# EAGLE board MotorBoardDev (EAGLE 8.4.1)
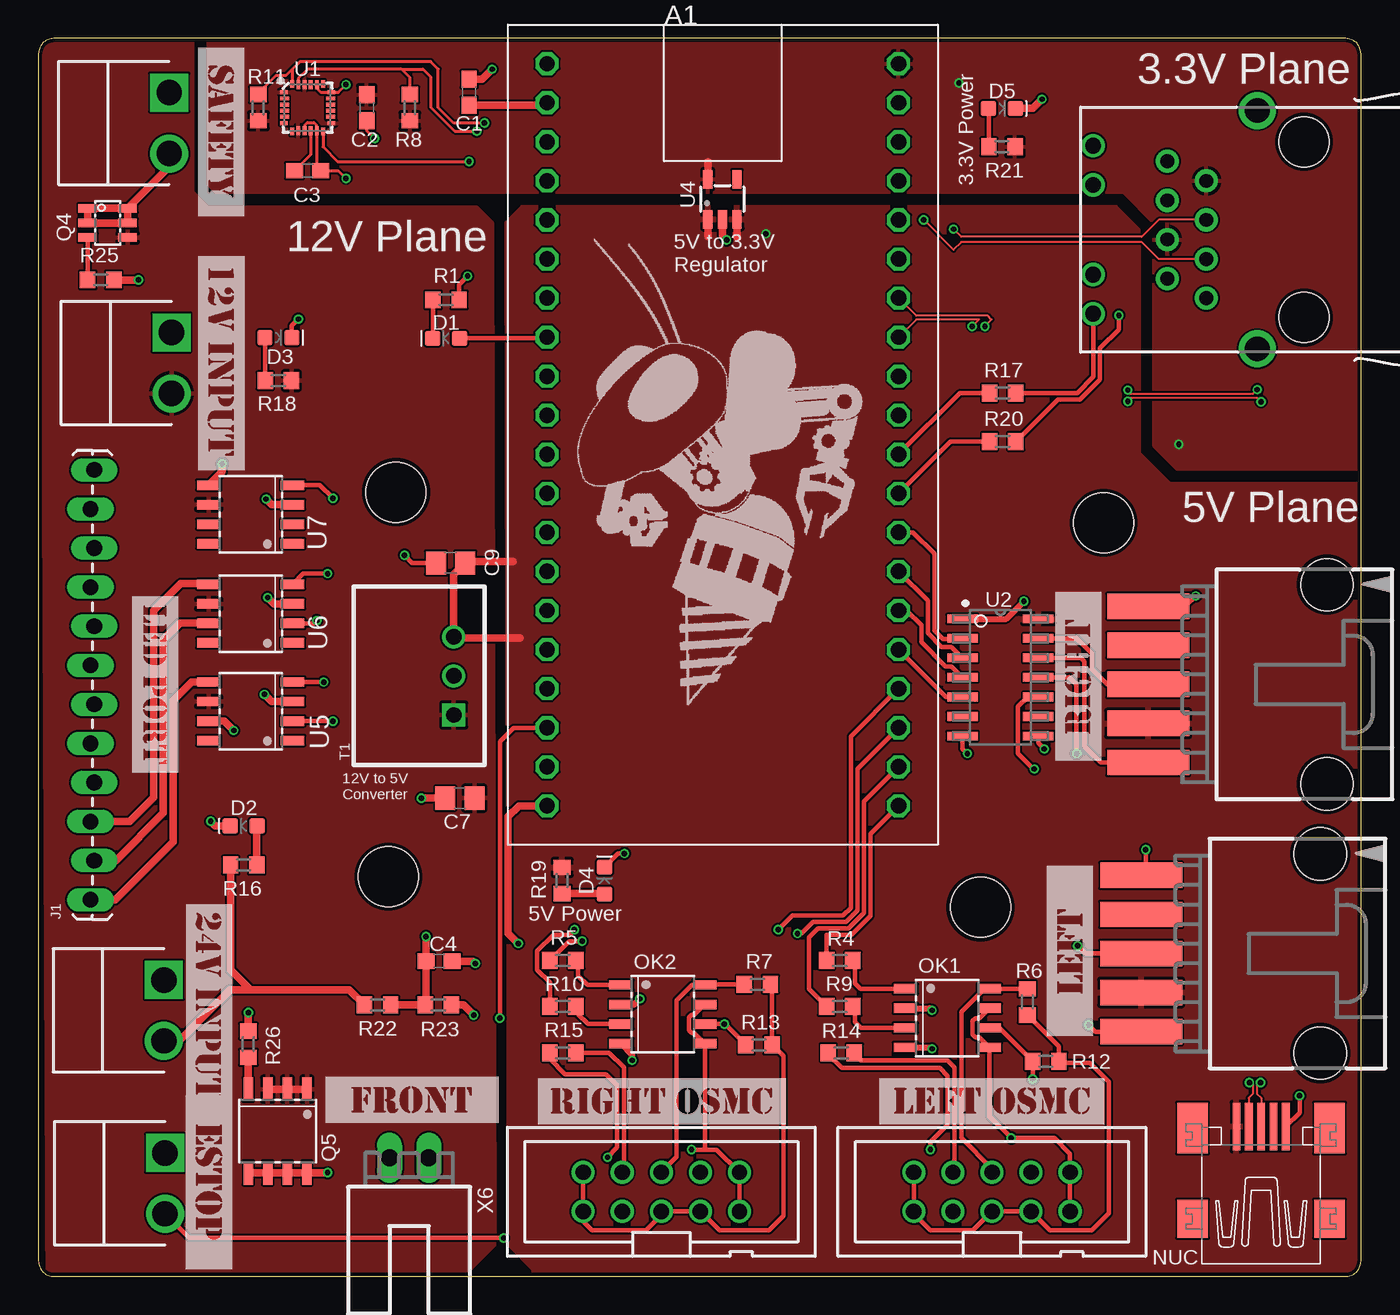
[diagram p0: board, top side]
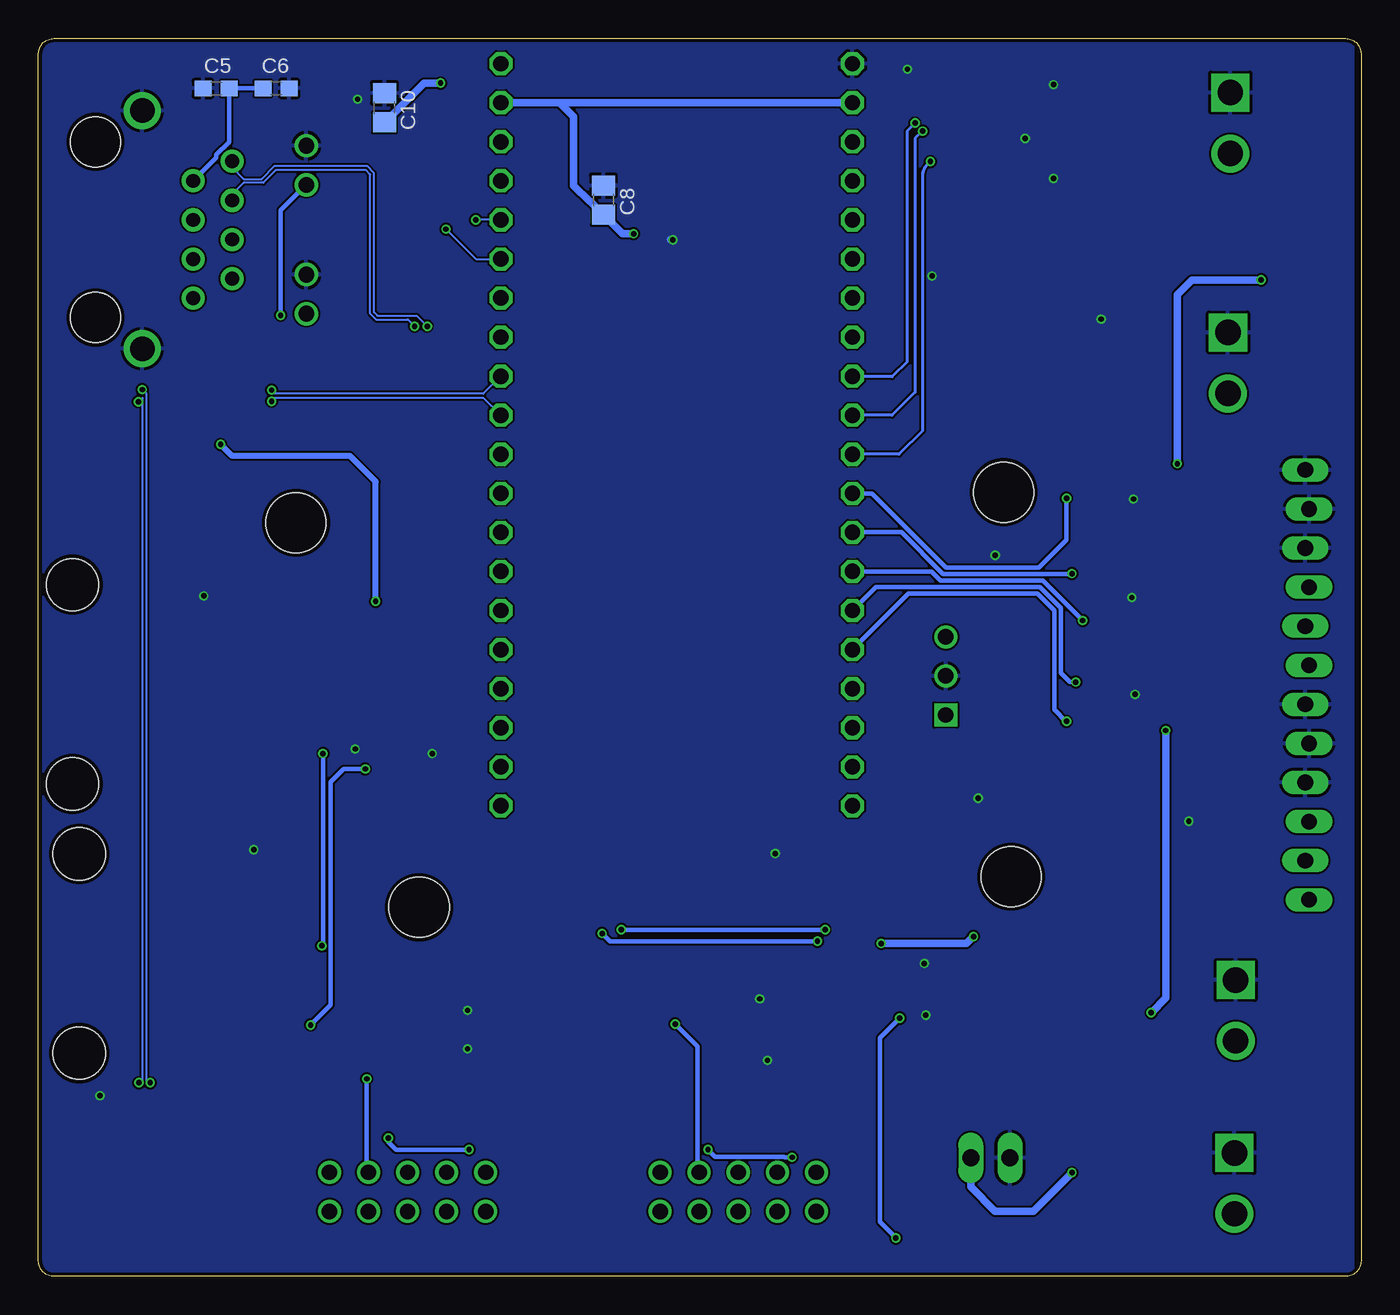
[diagram p1: board, bottom side, seen from below]

Size 86 x 80.5 mm. Coordinates in mm from the lower left corner, seen from the top.
Outline: 0,79.5 0,1 arc90 1,0 85,0 arc90 86,1 86,79.5 arc90 85,80.5 1,80.5 arc90 0,79.5
Copper layers (1*16): Top 0.018mm / dielectric 1.55mm / Bottom 0.018mm
Design rules "eC_2Layer_PClass7_BaseCopperO18": minimum track width 0.125mm, minimum drill 0.35mm, track to track 0.125mm, track to pad 0.125mm, pad to pad 0.125mm, via to via 0.125mm, smd to smd 0mil, copper to edge 0.25mm, drill to drill 0.35mm, minimum pad ring 0.175mm, minimum via ring 0.125mm, stop-mask expansion 0mil, vias tented up to drill 0.45mm, thermal gap 0.2mm

## Footprints (pad centres in the part's own frame; a part is rotated, then mirrored left to right if it is on the bottom)
SPARKFUN-BOARDS_DIL40_0.9 = drill 1 pad 1.397 octagon: 1 -22.86,-11.43; 2 -20.32,-11.43; 3 -17.78,-11.43; 4 -15.24,-11.43; 5 -12.7,-11.43; 6 -10.16,-11.43; 7 -7.62,-11.43; 8 -5.08,-11.43; 9 -2.54,-11.43; 10 0,-11.43; 11 2.54,-11.43; 12 5.08,-11.43; 13 7.62,-11.43; 14 10.16,-11.43; 15 12.7,-11.43; 16 15.24,-11.43; 17 17.78,-11.43; 18 20.32,-11.43; 19 22.86,-11.43; 20 25.4,-11.43; 21 25.4,11.43; 22 22.86,11.43; 23 20.32,11.43; 24 17.78,11.43; 25 15.24,11.43; 26 12.7,11.43; 27 10.16,11.43; 28 7.62,11.43; 29 5.08,11.43; 30 2.54,11.43; 31 0,11.43; 32 -2.54,11.43; 33 -5.08,11.43; 34 -7.62,11.43; 35 -10.16,11.43; 36 -12.7,11.43; 37 -15.24,11.43; 38 -17.78,11.43; 39 -20.32,11.43; 40 -22.86,11.43
C0603 = smd 1.1 x 1: 1 -0.85,0; 2 0.85,0
C0805 = smd 1.3 x 1.5: 1 -0.95,0; 2 0.95,0
LED-0603 = smd 1 x 1: A -0.877,0; C 0.877,0
1X12_LOCK_LONGPADS = drill 1.016 long: 1 0,0.127; 2 2.54,-0.127; 3 5.08,0.127; 4 7.62,-0.127; 5 10.16,0.127; 6 12.7,-0.127; 7 15.24,0.127; 8 17.78,-0.127; 9 20.32,0.127; 10 22.86,-0.127; 11 25.4,0.127; 12 27.94,-0.127
B2PS-CENTERED = drill 1.65 square: 1 -1.98,0 | drill 1.65: 2 1.98,0
SOIC08-FAIRCHILD = smd 0.61 x 1.52: 1 -1.905,-2.723; 2 -0.635,-2.723; 3 0.635,-2.723; 4 1.905,-2.723; 5 1.905,2.723; 6 0.635,2.723; 7 -0.635,2.723; 8 -1.905,2.723
SOT23-6 = smd 0.55 x 1.2: 1 -0.95,-1.3; 2 0,-1.3; 3 0.95,-1.3; 4 0.95,1.3; 5 0,1.3; 6 -0.95,1.3
SOIC-8 = smd 0.61 x 1.52: 1 -1.905,-2.723; 2 -0.635,-2.723; 3 0.635,-2.723; 4 1.905,-2.723; 5 1.905,2.723; 6 0.635,2.723; 7 -0.635,2.723; 8 -1.905,2.723
R0603 = smd 1 x 1.1: 1 -0.85,0; 2 0.85,0
R-78E = drill 1 square: 1 -2.54,0 | drill 1: 2 0,0; 3 2.54,0
QFN24-3X3 = smd 0.495 x 0.25: 1 -1.552,1; 6 -1.552,-1; 13 1.552,-1; 18 1.552,1 | smd 0.6 x 0.25: 2 -1.5,0.6; 3 -1.5,0.2; 4 -1.5,-0.2; 5 -1.5,-0.6; 14 1.5,-0.6; 15 1.5,-0.2; 16 1.5,0.2; 17 1.5,0.6 | smd 0.25 x 0.495: 7 -1,-1.552; 12 1,-1.552; 19 1,1.552; 24 -1,1.552 | smd 0.25 x 0.6: 8 -0.6,-1.5; 9 -0.2,-1.5; 10 0.2,-1.5; 11 0.6,-1.5; 20 0.6,1.5; 21 0.2,1.5; 22 -0.2,1.5; 23 -0.6,1.5
D14 = smd 1.981 x 0.559: 1 -2.464,3.81; 2 -2.464,2.54; 3 -2.464,1.27; 4 -2.464,0; 5 -2.464,-1.27; 6 -2.464,-2.54; 7 -2.464,-3.81; 8 2.464,-3.81; 9 2.464,-2.54; 10 2.464,-1.27; 11 2.464,0; 12 2.464,1.27; 13 2.464,2.54; 14 2.464,3.81
SOT-23-5 = smd 0.6 x 1.2: 1 -0.95,-1.306; 2 0,-1.306; 3 0.95,-1.306; 4 0.95,1.306; 5 -0.95,1.306
STANDOFF-HOLE = hole 3.9: 0,0
32005-400 = smd 3.1 x 0.5: 1 3,1.6; 2 3,0.8; 3 3,0; 4 3,-0.8; 5 3,-1.6 | smd 2.5 x 2: M1 -3,-4.45; M2 -3,4.45 | smd 3.3 x 2: M3 2.9,4.45; M4 2.9,-4.45
15-91-05 = smd 1.651 x 5.334: 1 -5.08,-10.795; 2 -2.54,-10.795; 3 0,-10.795; 4 2.54,-10.795; 5 5.08,-10.795 | hole 3.404: -6.477,0.838; 6.477,0.838
PAK100/2500-10 = drill 1 pad 1.422: 1 -5.08,-1.27; 2 -5.08,1.27; 3 -2.54,-1.27; 4 -2.54,1.27; 5 0,-1.27; 6 0,1.27; 7 2.54,-1.27; 8 2.54,1.27; 9 5.08,-1.27; 10 5.08,1.27
70553-02 = drill 1.092 long: 1 -1.27,-7.62; 2 1.27,-7.62
SI-50170 = drill 0.9 pad 1.5: 1 4.445,5.842; 2 3.175,3.302; 3 1.905,5.842; 4 0.635,3.302; 5 -0.635,5.842; 6 -1.905,3.302; 7 -3.175,5.842; 8 -4.445,3.302 | drill 1.016 pad 1.5: A1 -5.461,10.668; A2 2.921,10.668; C1 -2.921,10.668; C2 5.461,10.668 | drill 1.6 pad 2.2: S1 -7.747,0; S2 7.747,0 | hole 3.251: -5.715,-3.048; 5.715,-3.048

## Placement (x,y rotation side)
A1  MBED1768  [SPARKFUN-BOARDS_DIL40_0.9]  44.5,56 270 top
C1  0.1uF  [C0603]  28,77 90 top
C2  0.1uF  [C0603]  21.35,76 270 top
C3  0.1uF  [C0603]  17.5,71.9 0 top
C4  0.1uF  [C0603]  26.05,20.5 0 top
C5  0.1uF  [C0603]  74.45,77.25 180 bottom
C6  0.1uF  [C0603]  70.55,77.25 0 bottom
C7  10uF  [C0805]  27.4,31.1 180 top
C8  10uF  [C0805]  49.26,69.98 90 bottom
C9  10uF  [C0805]  26.8,46.4 180 top
C10  1uF  [C0805]  63.5,76 90 bottom
D1  BLUE  [LED-0603]  26.5,61 180 top
D2  Yellow  [LED-0603]  13.35,29.3 180 top
D3  BLUE  [LED-0603]  15.6,61.05 0 top
D4  GREEN  [LED-0603]  36.8,25.73 90 top
D5  GREEN  [LED-0603]  62.65,75.95 0 top
J1  Under Glow  [1X12_LOCK_LONGPADS]  3.5,24.5 90 top
J2  B2PS-VH(LF)(SN)  [B2PS-CENTERED]  8.5,75 270 top
J3  B2PS-VH(LF)(SN)  [B2PS-CENTERED]  8.65,59.4 270 top
J4  B2PS-VH(LF)(SN)  [B2PS-CENTERED]  8.15,17.3 270 top
J5  B2PS-VH(LF)(SN)  [B2PS-CENTERED]  8.23,6.05 270 top
OK1  MOCD208M  [SOIC08-FAIRCHILD]  59.1,16.8 270 top
OK2  MOCD208M  [SOIC08-FAIRCHILD]  40.6,17.05 270 top
Q4  STT4P3LLH6  [SOT23-6]  4.5,68.5 270 top
Q5  RRH100P03GZETB  [SOIC-8]  15.55,9.45 180 top
R1  100  [R0603]  26.5,63.5 180 top
R4  30  [R0603]  52.1,20.55 0 top
R5  30  [R0603]  34.1,20.55 0 top
R6  4.7k  [R0603]  64.3,17.85 270 top
R7  4.7k  [R0603]  46.75,19 0 top
R8  4.7k  [R0603]  24.15,76 270 top
R9  30  [R0603]  52.1,17.55 0 top
R10  30  [R0603]  34.1,17.55 0 top
R11  4.7k  [R0603]  14.3,76 270 top
R12  4.7k  [R0603]  65.5,14 0 top
R13  4.7k  [R0603]  46.85,15.05 0 top
R14  1k  [R0603]  52.2,14.55 0 top
R15  1k  [R0603]  34.1,14.55 0 top
R16  1.8k  [R0603]  13.35,26.75 180 top
R17  500  [R0603]  62.7,57.45 0 top
R18  1k  [R0603]  15.6,58.25 0 top
R19  200  [R0603]  34.05,25.75 90 top
R20  500  [R0603]  62.7,54.3 0 top
R21  100  [R0603]  62.65,73.45 0 top
R22  4.7k  [R0603]  22.05,17.65 180 top
R23  510  [R0603]  26,17.65 180 top
R25  2.7k  [R0603]  4.05,64.8 180 top
R26  2.7k  [R0603]  13.65,15.1 270 top
T1  R-78E5.0-1.0  [R-78E]  27,39.05 90 top
U1  9DoF IMU  [QFN24-3X3]  17.5,76 0 top
U2  TXB0104DR  [D14]  62.55,38.95 0 top
U4  TLV70233DBVR  [SOT-23-5]  44.47,70.04 0 top
U5  TC4427ACOA713  [SOIC-8]  13.8,36.75 90 top
U6  TC4427ACOA713  [SOIC-8]  13.8,43.1 90 top
U7  TC4427ACOA713  [SOIC-8]  13.8,49.55 90 top
U$1  [STANDOFF-HOLE]  23.25,51 0 top
U$2  [STANDOFF-HOLE]  22.75,26 0 top
U$3  [STANDOFF-HOLE]  61.25,24 0 top
U$4  [STANDOFF-HOLE]  69.25,49 0 top
U$5  [12VINPUT]  10.4,66.35 270 top
U$6  [24VINPUT]  9.6,24.2 270 top
U$7  [LEFTOSMC]  54.7,9.9 0 top
U$8  [RIGHTOSMC]  32.5,9.9 0 top
U$9  [LEDPORT]  6.1,44.2 270 top
U$10  [ROBOBUZZ_1.4X]  42.15,37.15 0 top
U$11  [ESTOP]  9.6,11.75 270 top
U$12  [SAFETY]  10.4,79.9 270 top
U$13  [LEFT]  68.55,15.65 90 top
U$14  [RIGHT]  69.1,33.55 90 top
U$15  [FRONT]  18.7,10 0 top
X1  MINI-USB_SHIELD5P4-32005-400  [32005-400]  79.5,6.75 90 top
X2  C-GRID-05-15-91  [15-91-05]  82.95,38.5 270 top
X3  2510-  [PAK100/2500-10]  62,5.5 0 top
X4  2510-  [PAK100/2500-10]  40.5,5.5 0 top
X5  C-GRID-05-15-91  [15-91-05]  82.5,21 270 top
X6  C-GRID-02-70553  [70553-02]  24.1,0.1 180 top
X7  SI-50170  [SI-50170]  79.25,68.06 90 top

## Library data of the parts
A1 = MotorBoardDev; PROD_ID: COMP-12167
C1-C10 R1 R4-R23 R25 R26 = rcl
D1 D3 = SparkFun-LED; PROD_ID: DIO-08575
D2 = SparkFun-LED; PROD_ID: DIO-09003
D4 D5 = SparkFun-LED; PROD_ID: DIO-00821
J1 = SparkFun-Connectors
J2-J5 = RoboJackets-Connectors; DIGIKEY: 455-1648-ND; MPN: B2PS-VH(LF)(SN)
OK1 OK2 = optocoupler; MF: FAIRCHILD SEMICONDUCTOR; MPN: MOCD208M; OC_FARNELL: 1505465; OC_NEWARK: 34C7498
Q4 Q5 T1 U5-U7 U$1-U$9 U$11-U$15 = MotorBoardDev
U1 = SparkFun-Sensors; PROD_ID: IC-13192
U2 = MotorBoardDev; MANUFACTURER_PART_NUMBER: TXB0104DR; VENDOR: Texas Instruments
U4 = RoboJackets-PowerICs; DIGIKEY: 296-32415-1-ND; MPN: TLV70233DBVR
U$10 = RoboJackets-Aesthetics
X1 = con-cypressindustries; OC_FARNELL: unknown; OC_NEWARK: unknown
X2 X5 X6 = con-molex; OC_FARNELL: unknown; OC_NEWARK: unknown
X3 X4 = con-3m; MF: 3M; MPN: 2510-6002UB; OC_FARNELL: 9838244; OC_NEWARK: 46F4725
X7 = con-stewart; OC_FARNELL: unknown; OC_NEWARK: unknown

## Nets
3V3_LED_R: D5.A R21.1
5V_LED_R: D4.A R19.1
12V_LED_R: D3.A R18.1
24V_LED_R: D2.A R16.1
+3V3: A1.40 C2.1 C5.1 C6.1 C10.1 R8.2 R11.2 R21.2 U1.1 U1.8 U1.13 U1.22 U2.1 U4.5 X7.2 X7.5
+5V: A1.2 A1.39 C1.1 C8.1 C9.1 R19.2 T1.3 U2.14 U4.1 U4.3 X1.1 X2.4 X5.4
+12V: C7.1 J3.2 Q4.4 Q5.1 Q5.2 Q5.3 R18.2 T1.1 U5.6 U6.6 U7.6
+24V: J4.2 R16.2 R22.2
BATTIN: A1.20 C4.1 R22.1 R23.2
BLUE_3V3: A1.15 U5.4
BLUE_OUT: J1.1 U5.5
D_N: A1.32 X1.2
D_P: A1.31 X1.3
ESTOP: A1.18 J5.2
ETH_LED1: A1.30 R17.1
ETH_LED2: A1.29 R20.1
FRONT_HDR: Q5.5 Q5.6 Q5.7 Q5.8 X6.1
FRONT_LIGHT: R26.1 U5.7
FRONT_LIGHT_3V3: A1.16 U5.2
FRONT_R: Q5.4 R26.2
GND: A1.1 C1.2 C2.2 C3.2 C4.2 C5.2 C6.2 C7.2 C8.2 C9.2 C10.2 D2.C D3.C D4.C D5.C J1.4 J1.5 J1.6 J1.10 J1.11 J1.12 J2.1 J3.1 J4.1 J5.1 OK1.2 OK1.4 OK2.2 OK2.4 R1.1 R23.1 T1.2 U1.9 U1.11 U1.18 U1.20 U2.7 U2.8 U4.2 U5.3 U6.3 U7.3 X1.5 X2.1 X5.1 X6.2 X7.C1 X7.C2 X7.S1 X7.S2
GREEN_3V3: A1.14 U6.2
GREEN_OUT: J1.2 U6.7
GYRO_INT: A1.11 U1.12
INDI_LED_R: D1.C R1.2
INDICATOR_LED: A1.8 D1.A
L+12V: R6.2 R12.2 X3.1 X3.2 X3.5 X3.7
LALI: OK1.8 R6.1 X3.6
LALI_CTRL: A1.21 R4.1
LBLI: OK1.6 R12.1 X3.8
LBLI_CTRL: A1.22 R9.1
LDISABLE: R14.2 X3.4
LEA: U2.11 X5.3
LEA3: A1.26 U2.4
LEB: U2.10 X5.5
LEB3: A1.25 U2.5
LGND: OK1.5 OK1.7 R14.1 X3.9 X3.10
N$1: R17.2 X7.A1
N$2: R20.2 X7.A2
R+12V: R7.2 R13.2 X4.1 X4.2 X4.5 X4.7
R_OK3A: OK1.1 R4.2
R_OK3B: OK1.3 R9.2
R_OK4A: OK2.1 R5.2
R_OK4B: OK2.3 R10.2
RALI: OK2.8 R7.1 X4.6
RALI_CTRL: A1.23 R5.1
RBLI: OK2.6 R13.1 X4.8
RBLI_CTRL: A1.24 R10.1
RD_N: A1.36 X7.6
RD_P: A1.35 X7.4
RDISABLE: R15.2 X4.4
REA: U2.13 X2.3
REA3: A1.28 U2.2
REB: U2.12 X2.5
REB3: A1.27 U2.3
RED_3V3: A1.13 U6.4
RED_OUT: J1.3 U6.5
REGOUT_C: C3.1 U1.10
RGND: OK2.5 OK2.7 R15.1 X4.9 X4.10
SAFETY_HRD: J2.2 Q4.1 Q4.2 Q4.5 Q4.6
SAFETY_LIGHT: R25.1 U7.5
SAFETY_LIGHT_3V3: A1.12 U7.4
SAFETY_R: Q4.3 R25.2
SCL: A1.10 R8.1 U1.23
SDA: A1.9 R11.1 U1.24
TD_N: A1.34 X7.3
TD_P: A1.33 X7.1

## Tracks (layer width: path | path; a pad name or v marks a point on that pad's centre or on a via)
3V3_LED_R
  Top 0.3: R21.1 61.8,75.92
  Top 0.5: 61.8,75.92 D5.A
5V_LED_R
  Top 0.5: R19.1 36.75,24.9 D4.A
12V_LED_R
  Top 0.3: R18.1 14.75,61.22 D3.A
24V_LED_R
  Top 0.5: R16.1 14.2,29.27 D2.A
+3V3  (via drill 0.35)
  Top 0.4: U2.1 62.94,42.76 v64.08,43.9
  Top 0.5: U4.5 43.52,72.49
  Bottom 0.3: X7.2 74.43,72.75 74.43,72.94 73.6,73.77 C5.1 C6.1
  Bottom 0.4: v64.08,43.9 64.08,51.67 65.75,53.35 73.4,53.35 v74.15,54.1
  Bottom 0.5: v59.85,77.6 60.92,77.6 63.47,75.05 C10.1
  pour Top: 70.5,70.5 72.5,68.5 72.5,54 74,52.5 85.75,52.5 85.75,79.25 arc90 84.75,80.25 11,80.25 11,71 11.5,70.5
+5V  (via drill 0.35)
  Top 0.5: 43.52,67.61 U4.1 | U4.3 45.42,67.58 45.44,67.56 | 30.85,46.5 27.85,46.5 C9.1 27,45.65 T1.3 27.09,41.5 31.3,41.5 | C1.1 32.9,76.15 A1.2
  Bottom 0.5: v47.3,67.8 48.03,67.8 C8.1 50.13,69.91 50.16,69.91 51.2,70.94 51.2,75.4 52.12,76.32 | 52.12,76.32 A1.39 | 52.12,76.32 A1.2
  pour Top: 32.25,-1.95 32.25,0.35 32.3,0.45 30.65,2.1 30.5,68.5 31.5,69.5 70,69.5 71.5,68 71.5,53.5 73.5,51.5 95,51.5 95,-2
+12V
  Top 0.5: Q5.1 Q5.2 Q5.3
  pour Top: 10,80.5 10,70.5 11,69.5 28.5,69.5 29.5,68.5 29.65,2.1 27.8,0.25 29.5,-1.45 29.5,-2.05 0.6,-2.1 0.25,80.5
+24V
  Top 0.5: R22.2 20.21,18.64 13.8,18.64 | 13.8,18.64 12.46,18.64 9.15,15.32 J4.2 | R16.2 12.5,19.93 13.8,18.64
BATTIN  (via drill 0.35)
  Top 0.5: R22.1 R23.2 25.2,17.7 C4.1 v25.2,22.1 | v31.2,21.65 30.55,22.3 30.55,29.9 31.25,30.6 A1.20
  Bottom 0.5: v31.2,21.65 25.65,21.65 v25.2,22.1
BLUE_3V3  (via drill 0.35)
  Top 0.3: v18.55,38.65 U5.4
  Bottom 0.3: v18.55,38.65 18.95,38.65 19.53,39.23 19.53,43.47 20.88,44.83 31.55,44.83 A1.15
BLUE_OUT
  Top 0.5: U5.5 9.96,38.66 8.75,37.45 8.75,28.25 5,24.5 J1.1
D_N  (via drill 0.35)
  Top 0.125: v70.83,57.63 70.83,57.4 78.97,57.4 v79.25,57.66 | v78.74,12.6 78.97,12.6 78.97,11.88 78.7,11.6 X1.2
  Bottom 0.125: v70.83,57.63 70.83,57.4 57.08,57.4 A1.32 | v79.25,57.66 78.97,57.4 78.97,12.6 v78.74,12.6
D_P  (via drill 0.35)
  Top 0.125: v70.83,56.91 70.83,57.15 79.22,57.15 v79.5,56.88 | v79.46,12.6 79.22,12.6 79.22,11.88 79.5,11.6 X1.3
  Bottom 0.125: v70.83,56.91 70.83,57.15 57.08,57.15 A1.31 | v79.5,56.88 79.22,57.15 79.22,12.6 v79.46,12.6
ESTOP  (via drill 0.35)
  Top 0.3: v30,16.8 30,34.8 30.88,35.68 A1.18 | v30.25,2.5 9.81,2.5 J5.2
  Bottom 0.3: v30.25,2.5 31.3,3.55 31.3,15.5 v30,16.8
ETH_LED1
  Top 0.3: A1.30 59.92,57.45 R17.1
ETH_LED2
  Top 0.3: A1.29 59.31,54.3 R20.1
FRONT_HDR  (via drill 0.35)
  Top 0.5: Q5.5 Q5.6 Q5.7 Q5.8 17.48,6.75 v18.8,6.75
  Bottom 0.5: X6.1 25.37,5.82 23.8,4.25 21.3,4.25 v18.8,6.75
FRONT_LIGHT  (via drill 0.35)
  Top 0.5: v12.7,35.5 12.09,36.12 U5.7 | v13.65,17.15 R26.1
  Bottom 0.5: v13.65,17.15 12.7,18.1 v12.7,35.5
FRONT_LIGHT_3V3  (via drill 0.35)
  Top 0.3: v19.15,36.1 19.14,36.12 U5.2
  Bottom 0.3: v19.15,36.1 19.2,36.1 19.95,36.85 19.95,43.3 21.05,44.4 29.43,44.4 A1.16
FRONT_R
  Top 0.5: R26.2 Q5.4
GND  (via drill 0.35)
  Top 0.2: U1.9 17.35,74.55 17.35,74.89 17.48,75.03 17.92,75.03 18.05,74.89 18.05,74.55 U1.11 18.1,72.15 C3.2 19.5,71.9 v20,71.4 | U1.20 18.15,77.45 18.15,77.21 18.36,77 U1.18 19.5,77 v20,77.5 | C2.2 21.35,74.5 v21.85,74
  Top 0.3: C9.2 24.3,46.4 v23.8,46.9 | X2.1 74.58,43.58 v75.25,44.25 | X1.5 82,10.65 v82,11.75 | X5.1 72,26.38 v72,27.75 | R1.1 27.35,64.5 v27.9,65.05 | D4.C 37.69,27.5 v38.1,27.5 | D3.C 16.48,61.83 v16.9,62.25 | U2.7 60.09,34.31 v60.4,34 | U2.8 65.01,34.69 v65.4,34.3
  Top 0.4: OK2.4 38.6,14.42 v38.6,14.05 | OK2.2 38.73,17.68 v39.1,18.05 | OK1.2 57.97,17.43 v58.1,17.3 | OK1.4 58.01,14.89 v58.1,14.8
  Top 0.5: C1.2 28.85,77.85 v29.5,78.5 | C7.2 v24.9,31.1 | D5.C 64.65,75.95 v65.25,76.55 | R23.1 27.65,17.65 v28.3,17 | C4.2 28.25,20.5 v28.4,20.35 | U4.2 44.47,67.67 v44.74,67.4 | U5.3 15.16,37.38 v14.7,37.85 | U6.3 15.31,43.73 v14.9,44.15 | U7.3 15.16,50.19 v14.8,50.55 | D2.C 11.5,29.3 v11.2,29.6
  Bottom 0.5: v44.74,67.4 44.9,67.4
  pour Bottom: 0.5,83.5 98,83.5 98,-3.5 0.5,-3.5
GREEN_3V3  (via drill 0.35)
  Top 0.3: U6.2 17.91,42.47 v18.1,42.65
  Bottom 0.3: v18.1,42.65 20.7,45.25 27.35,45.25 27.94,45.84 A1.14
GREEN_OUT
  Top 0.5: J1.2 5.04,27.04 8.12,30.12 8.12,41.42 9.2,42.5 11.04,42.5 U6.7
GYRO_INT  (via drill 0.35)
  Top 0.2: U1.12 18.5,73.45 19.45,72.5 v28,72.5
  Bottom 0.2: v28,72.5 28.21,72.29 arc-45 28.5,71.59 28.5,55 30.04,53.46 A1.11
INDI_LED_R
  Top 0.3: D1.C 25.65,61.03 R1.2
INDICATOR_LED
  Top 0.3: D1.A 32.99,61 A1.8
L+12V
  Top 0.3: X3.2 X3.1 56.92,4.08 58,3 60.77,3 X3.5 X3.7 65.77,3 68.5,3 69.6,4.1 69.6,12.65 68.35,13.9 66.45,13.9 R12.2 66.35,14.95 R6.2
LALI
  Top 0.3: X3.6 62,7 60,9 60,17.2 61.51,18.7 | OK1.8 | OK1.8 R6.1
  Top 0.4: 61.51,18.7 OK1.8
LALI_CTRL
  Top 0.3: R4.1 51.25,22.2 52.85,22.2 54.1,23.45 54.1,28.77 A1.21
LBLI  (via drill 0.35)
  Top 0.3: OK1.6 62.48,16.16 R12.1 v64.65,12.85
  Bottom 0.3: 64.5,6.81 X3.8 64.65,6.88 v64.65,12.85
LBLI_CTRL
  Top 0.3: R9.1 50.1,18.7 50.1,22.05 50.67,22.62 52.67,22.62 53.67,23.63 53.67,30.89 A1.22
LDISABLE
  Top 0.3: R14.2 53.45,14.15 53.45,14.05 59.1,14.05 59.56,13.59 59.56,6.87 X3.4
LEA  (via drill 0.35)
  Top 0.3: v67.5,34 67.5,38.5 67.02,38.98 66.99,38.95 U2.11 | X5.3 68.08,21 v67.58,21.5
  Bottom 0.3: v67.5,34 67.5,21.5 v67.58,21.5
LEA3
  Top 0.3: 60.28,38.95 U2.4 59.37,39.67 58.98,39.67 57.4,41.25 57.4,42.35 56.45,43.3 A1.26
LEB  (via drill 0.35)
  Top 0.3: 64.75,37.68 64.48,37.68 | 64.75,37.68 U2.10 | v64.75,33 64.7,33 63.7,34 63.7,37.05 64.33,37.68 64.75,37.68 | X5.5 68.73,15.92 v68.3,16.35
  Bottom 0.3: v64.75,33 66.15,33 67,32.15 67,17.65 v68.3,16.35
LEB3
  Top 0.3: A1.25 59.01,37.68 U2.5
LGND  (via drill 0.35)
  Top 0.3: OK1.7 61.18,16.8 60.93,16.8 60.74,16.61 60.74,15.72 60.93,15.54 61.18,15.54 OK1.5 | X3.9 X3.10 67.08,7.97 66.05,9 v63.25,9 61.82,10.43 OK1.5 | 61.92,14.8 OK1.5 | OK1.5 62.26,14.89 | v58,8.25 58,8.75 59.1,9.85 59.1,13.05 58.6,13.55 52.25,13.55 51.35,14.45 R14.1
  Bottom 0.3: v63.25,9 63.25,8.75 62.75,8.25 v58,8.25
N$1
  Top 0.3: R17.2 67.55,57.45 68.6,58.5 68.6,62.59 X7.A1
N$2  (via drill 0.35)
  Top 0.3: R20.2 66.28,57.02 67.73,57.02 69.03,58.32 69.03,60.35 70.25,61.58 v70.25,62.5
  Bottom 0.3: v70.25,62.5 70.25,69.32 X7.A2
R+12V
  Top 0.3: X4.2 X4.1 35.42,3.58 36,3 39.5,3 40.5,4 X4.5 X4.7 44.27,3 47.5,3 48.45,3.95 48.45,14.35 47.7,15.1 | R7.2 47.7,18.9 47.7,15.1 | 47.7,15.1 R13.2
R_OK3A
  Top 0.3: OK1.1 53.45,18.7 53.1,19.05 53.1,20.4 R4.2
R_OK3B
  Top 0.3: OK1.3 53.48,16.16 53.1,16.55 53.1,17.4 R9.2
R_OK4A
  Top 0.3: OK2.1 35.7,18.95 35.1,19.55 35.1,20.4 R5.2
R_OK4B
  Top 0.3: OK2.3 35.73,16.41 35.1,17.05 35.1,17.4 R10.2
RALI
  Top 0.3: X4.6 41.5,7.77 41.5,17.95 42.51,18.95 OK2.8 43.37,19 R7.1
RALI_CTRL  (via drill 0.35)
  Top 0.3: v35.35,21.8 34.5,21.8 R5.1 | v49.35,22.3 49.6,22.3 50.35,23.05 52.5,23.05 53.25,23.8 53.25,33 A1.23
  Bottom 0.3: v35.35,21.8 48.85,21.8 v49.35,22.3
RBLI  (via drill 0.35)
  Top 0.3: OK2.6 v44.6,16.41 44.63,16.41 R13.1
  Bottom 0.3: v44.6,16.41 43.14,14.96 43.14,6.87 X4.8
RBLI_CTRL  (via drill 0.35)
  Top 0.3: v34.85,22.55 34.52,22.23 33.49,22.23 32.42,21.16 32.42,19.94 33.25,19.11 R10.1 | A1.24 52.83,35.12 52.83,23.98 52.32,23.48 49.02,23.48 v48.1,22.55
  Bottom 0.3: v48.1,22.55 v34.85,22.55
RD_N  (via drill 0.35)
  Top 0.125: X7.6 72.84,66.16 71.74,67.26 60,67.26 59.5,66.76 v57.56,68.7
  Bottom 0.125: A1.36 v57.56,68.7
RD_P  (via drill 0.35)
  Top 0.125: X7.4 72.84,68.7 71.74,67.6 60,67.6 v59.5,68.1
  Bottom 0.125: v59.5,68.1 57.56,66.16 A1.35
RDISABLE
  Top 0.3: R15.2 37.1,14.55 38.06,13.59 38.06,6.87 X4.4
REA
  Top 0.3: X2.3 69.5,38.5 68.5,39.5 68.5,40.5 67.5,41.5 67.49,41.49 U2.13
REA3
  Top 0.3: U2.2 60.05,41.45 58.8,41.45 58.25,42 58.25,47 56.87,48.38 A1.28
REB
  Top 0.3: X2.5 69.08,33.42 68,34.5 68,40 67.75,40.25 67.72,40.22 U2.12
REB3
  Top 0.3: A1.27 57.83,43.95 57.83,41.82 58.71,40.94 59.37,40.94 U2.3
RED_3V3  (via drill 0.35)
  Top 0.3: v18.8,45.7 17.22,45.7 U6.4
  Bottom 0.3: v18.8,45.7 18.82,45.67 27.18,45.67 29.9,48.4 33.05,48.4 A1.13
RED_OUT
  Top 0.5: 3.88,29.58 J1.3 5.93,29.58 7.5,31.15 7.5,43.3 9.25,45.05 11.03,45.05 U6.5
REGOUT_C
  Top 0.2: U1.10 17.7,72.95 C3.1
RGND  (via drill 0.35)
  Top 0.3: OK2.7 42.63,17 42.45,17 42.29,16.83 42.29,16 42.45,15.84 42.63,15.84 OK2.5 43.35,15.12 43.35,8.25 | X4.9 X4.10 | X4.10 45.45,6.77 | R15.1 33.25,14.15 34.25,13.15 36.9,13.15 37.63,12.41 37.63,8.38 v37,7.75 | X4.10 44.1,8.25 43.35,8.25 | 43.35,8.25 v42.47,8.25
  Bottom 0.3: v37,7.75 37.49,7.75 37.53,7.79 42.01,7.79 v42.47,8.25
SAFETY_HRD
  Top 0.5: Q4.6 8.5,72.15 J2.2 | Q4.6 Q4.5 Q4.2 Q4.1 Q4.6
SAFETY_LIGHT  (via drill 0.35)
  Top 0.5: U7.5 11.95,52.33 v11.95,52.85 | v6.5,64.8 R25.1
  Bottom 0.5: v11.95,52.85 11.95,63.85 11,64.8 v6.5,64.8
SAFETY_LIGHT_3V3  (via drill 0.35)
  Top 0.3: v19.15,50.6 18.3,51.45 U7.4
  Bottom 0.3: v19.15,50.6 19.15,47.9 20.95,46.1 27,46.1 31.82,50.92 A1.12
SAFETY_R
  Top 0.3: R25.2 Q4.3
SCL  (via drill 0.35)
  Top 0.2: U1.23 16.9,77.9 17.5,78.5 23.6,78.5 | 23.6,78.5 25,78.5 25.5,78 25.5,76.04 27.07,74.47 v28.5,74.47 | R8.1 24.15,77.95 23.6,78.5
  Bottom 0.2: v28.5,74.47 28.52,74.47 29,74 29,57.5 30.5,56 A1.10
SDA  (via drill 0.35)
  Top 0.2: 16.55,77.6 U1.24 16.5,78.5 | v29,75 27,75 26,76 26,78.5 25.5,79 17,79 16.5,78.5 | R11.1 14.3,76.95 15.45,78.1 16.1,78.1 16.5,78.5
  Bottom 0.2: v29,75 29.5,74.5 29.5,59.5 30.5,58.5 33.03,58.5 A1.9
TD_N  (via drill 0.35)
  Top 0.125: v61.54,61.78 61.98,62.23 61.73,62.48 57.08,62.48 A1.34
  Bottom 0.125: X7.3 73.41,70.36 72.66,71.11 71.39,71.11 70.54,71.97 64.74,71.97 64.42,71.65 64.42,62.59 64.06,62.23 61.98,62.23 v61.54,61.78
TD_P  (via drill 0.35)
  Top 0.125: v60.72,61.78 61.16,62.23 57.08,62.23 A1.33
  Bottom 0.125: X7.1 73.41,72.12 72.66,71.36 71.49,71.36 70.64,72.22 64.64,72.22 64.17,71.75 64.17,62.7 63.95,62.48 61.41,62.48 v60.72,61.78

## Text on the board
tPlace: 3.3V Plane | 3.3V Power | 12V Plane | 5V to 3.3V / Regulator | 5V Plane | 12V to 5V / Converter | 5V Power | NUC